# EAGLE board usb_current_mon (EAGLE 6.4)
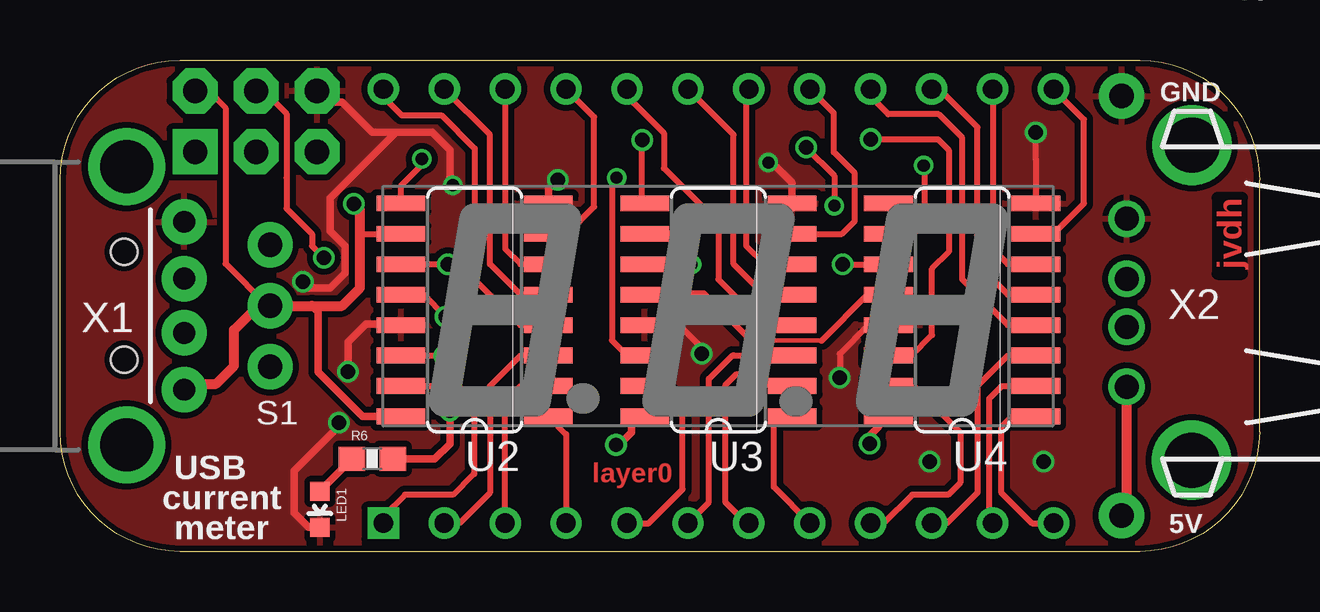
[diagram p0: board, top side]
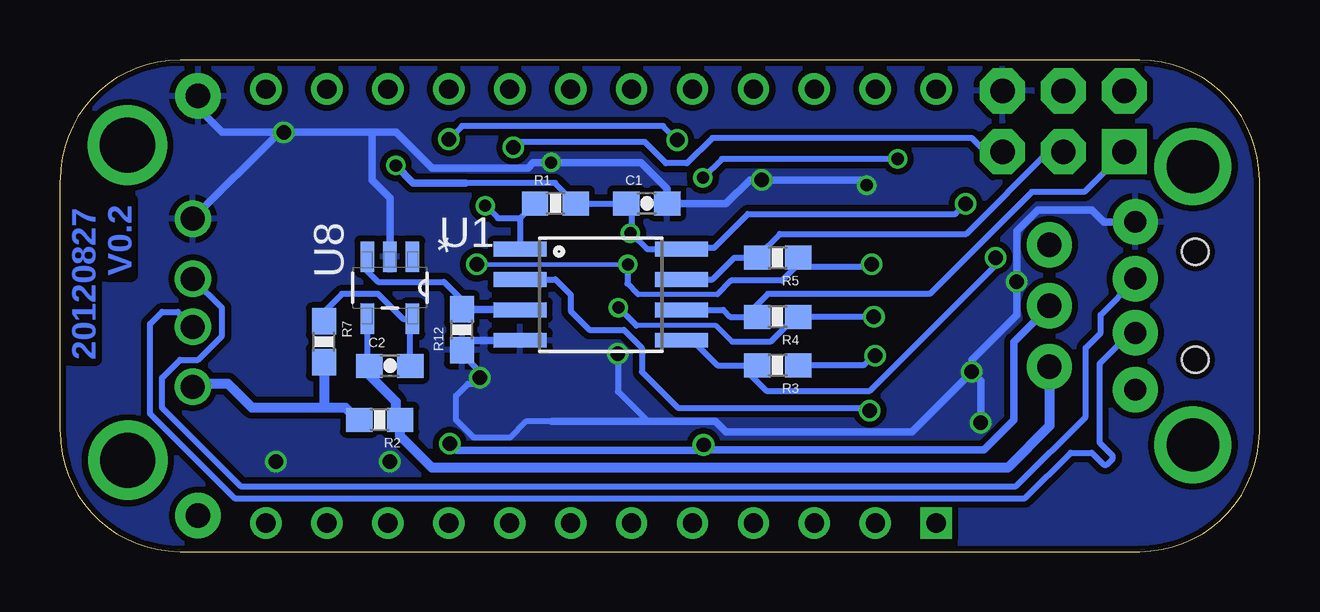
[diagram p1: board, bottom side, seen from below]

Size 50 x 20.5 mm. Coordinates in mm from the lower left corner, seen from the top.
Outline: 0,5 0,15.5 arc-90 5,20.5 45,20.5 arc-90 50,15.5 50,5 arc-90 45,0 5,0 arc-90 0,5
Copper layers (1*16): Top 0.035mm / dielectric 1.5mm / Bottom 0.035mm
Design rules "default": minimum track width 6mil, minimum drill 12mil, track to track 6mil, track to pad 6mil, pad to pad 6mil, via to via 6mil, smd to smd 0mil, copper to edge 10mil, drill to drill 10mil, minimum pad ring 10mil, minimum via ring 6mil, stop-mask expansion 2mil, vias tented up to drill 100mil, thermal gap 10mil

## Footprints (pad centres in the part's own frame; a part is rotated, then mirrored left to right if it is on the bottom)
0603-CAP = smd 1.1 x 1: 1 -0.85,0; 2 0.85,0
2X3-NS = drill 1.016 pad 1.88 square: 1 -2.54,-1.27 | drill 1.016 pad 1.88 octagon: 2 -2.54,1.27; 3 0,-1.27; 4 0,1.27; 5 2.54,-1.27; 6 2.54,1.27
1X01 = drill 1.016 pad 1.88: 1 0,0
LED-0603 = smd 0.8 x 0.8: A 0,-0.75; C 0,0.75
0603-RES = smd 1.1 x 1: 1 -0.85,0; 2 0.85,0
SWITCH-SPDT = drill 1.016 pad 1.88: 1 0,2.54; 2 0,0; 3 0,-2.54
SO08-EIAJ = smd 0.61 x 2.21: 1 -1.905,-3.378; 2 -0.635,-3.378; 3 0.635,-3.378; 4 1.905,-3.378; 5 1.905,3.353; 6 0.635,3.353; 7 -0.635,3.353; 8 -1.905,3.353
SO16 = smd 0.66 x 2.032: 1 -4.445,-3.073; 2 -3.175,-3.073; 3 -1.905,-3.073; 4 -0.635,-3.073; 5 0.635,-3.073; 6 1.905,-3.073; 7 3.175,-3.073; 8 4.445,-3.073; 9 4.445,3.073; 10 3.175,3.073; 11 1.905,3.073; 12 0.635,3.073; 13 -0.635,3.073; 14 -1.905,3.073; 15 -3.175,3.073; 16 -4.445,3.073
LCD-S301C31 = drill 0.8: A1 5.08,18.1; A2 15.24,18.1; A3 25.4,18.1; B1 7.62,18.1; B2 17.78,18.1; B3 27.94,18.1; C1 7.62,0; C2 17.78,0; C3 27.94,0; D1 5.08,0; D2 15.24,0; D3 25.4,0; DP1 10.16,0; DP2 20.32,0; E1 2.54,0; E2 12.7,0; E3 22.86,0; F1 2.54,18.1; F2 12.7,18.1; F3 22.86,18.1; G1 0,18.1; G2 10.16,18.1; G3 20.32,18.1 | drill 0.8 square: COM 0,0
SOT95P280X130-5N = smd 1.27 x 0.559: 1 -1.295,0.94; 2 -1.295,0; 3 -1.295,-0.94; 4 1.295,-0.94; 5 1.295,0.94
USB-A-H = drill 0.914 pad 1.88: D+ 2.4,1.127; D- 2.4,-1.127; GND 2.4,3.5; VBUS 2.4,-3.5 | drill 2.2: GND2 0,-5.8; GND3 0,5.8 | hole 1.1: -0.1,2.25; -0.1,-2.25
CON-AMP_USB = drill 1: 1 -3.5,12.99; 2 -1,12.99; 3 1,12.99; 4 3.5,12.99 | drill 2.3: P$1 6.575,10.264; P$2 -6.568,10.278

## Placement (x,y rotation side)
C1  100n  [0603-CAP]  25.54,14.52 0 bottom
C2  22p  [0603-CAP]  36.25,7.75 0 bottom
JP1  AVR_SPI_PRG_6NS  [2X3-NS]  8.18,17.94 0 top
JP3  M01PTH  [1X01]  44.25,1.5 0 top
JP4  M01PTH  [1X01]  44.25,19 0 top
LED1  [LED-0603]  10.84,1.75 180 top
R1  4k7  [0603-RES]  29.35,14.52 0 bottom
R2  0.024  [0603-RES]  36.67,5.5 180 bottom
R3  0  [0603-RES]  20.09,7.77 180 bottom
R4  0  [0603-RES]  20.09,9.79 180 bottom
R5  0  [0603-RES]  20.09,12.26 180 bottom
R6  620  [0603-RES]  13.02,3.87 0 top
R7  4.7k  [0603-RES]  39,8.75 270 bottom
R12  2.2k  [0603-RES]  33.25,9.25 90 bottom
S1  [SWITCH-SPDT]  8.76,10.25 0 top
U1  ATTINY45  [SO08-EIAJ]  27.45,10.71 270 bottom
U2  74HCT595D  [SO16]  17.29,10.07 90 top
U3  74HCT595D  [SO16]  27.45,10.07 90 top
U4  74HCT595D  [SO16]  37.6,10.07 90 top
U5  LCD-S301C31  [LCD-S301C31]  13.47,1.19 0 top
U8  ZXCT1010W5-7  [SOT95P280X130-5N]  36.25,11 270 bottom
U$2  [PF_LOGO_MEDIUM]  17.75,5.5 0 bottom
X1  USB-A-H  [USB-A-H]  2.77,10.25 0 top
X2  [CON-AMP_USB]  57.45,10.38 90 top

## Library data of the parts
C1 = SparkFun; FARNELL: 1759123; MF: AVX; MPN: 06033G104ZAT2A; OC_FARNELL: 317287
C2 = SparkFun; MF: AVX; MPN: 06033G104ZAT2A; OC_FARNELL: 317287
JP1 = SparkFun; MF: TE CONNECTIVITY / AMP; MPN: 826925-3; OC_FARNELL: 1248132
JP3 JP4 R2 R12 = SparkFun
LED1 = SparkFun; MF: AVAGO TECHNOLOGIES; MPN: ASMT-RR45-AQ902; OC_FARNELL: 1652080
R1 R7 = SparkFun; FARNELL: 2059627; MF: MULTICOMP; MPN: MCHP03W8F1002T5E; OC_FARNELL: 1576297
R3-R5 = SparkFun; FARNELL: 2008355; MF: BOURNS; MPN: CR0603-JW-102GLF; OC_FARNELL: 2008355
R6 = SparkFun; MF: MULTICOMP; MPN: MC 0.063W 0603 1% 620R; OC_FARNELL: 9331395
S1 = SparkFun; FARNELL: 674345; MF: EAO; MPN: 09-03290.01; OC_FARNELL: 674345
U1 = SparkFun; FARNELL: 1972162; MF: ATMEL; MPN: ATTINY45V-10SH; OC_FARNELL: 1972162
U2-U4 = 74xx-eu; FARNELL: 1288450; MF: TEXAS INSTRUMENTS; MPN: SN74AHC595D; OC_FARNELL: 1750222
U5 = usb_power; FARNELL: 1838930; MF: LUMEX; MPN: LCD-S301C31TR; OC_FARNELL: 1838930
U8 = usb_power; PACKAGE: SOT-25-5; SUPPLIER: DIODES INC.
U$2 = positive_feedback
X1 = SparkFun; FARNELL: 1696544; MF: MULTICOMP; MPN: MC32603; OC_FARNELL: 1696544
X2 = usb_current_mon; MF: MULTICOMP; MPN: MC32593; OC_FARNELL: 1696534

## Nets
!RST!: JP1.5 R1.1 U1.1
D+: X1.D+ X2.3
D-: X1.D- X2.2
DIG1_0: U2.6 U5.A1
DIG1_1: U2.7 U5.B1
DIG1_2: U2.1 U5.C1
DIG1_3: U2.2 U5.D1
DIG1_4: U2.3 U5.E1
DIG1_5: U2.5 U5.F1
DIG1_6: U2.4 U5.G1
DIG1_7: U2.15 U5.COM
DIG2_0: U3.6 U5.A2
DIG2_1: U3.7 U5.B2
DIG2_2: U3.1 U5.C2
DIG2_3: U3.2 U5.D2
DIG2_4: U3.3 U5.E2
DIG2_5: U3.5 U5.F2
DIG2_6: U3.4 U5.G2
DIG2_7: U3.15 U5.DP1
DIG3_0: U4.6 U5.A3
DIG3_1: U4.7 U5.B3
DIG3_2: U4.1 U5.C3
DIG3_3: U4.2 U5.D3
DIG3_4: U4.3 U5.E3
DIG3_5: U4.5 U5.F3
DIG3_6: U4.4 U5.G3
DIG3_7: U4.15 U5.DP2
GND: C1.2 JP1.6 JP4.1 LED1.C R12.1 U1.4 U2.8 U2.13 U3.8 U3.13 U4.8 U4.13 U8.2 X1.GND X2.4
MISO: JP1.1 R4.2 U1.6
MOSI: JP1.4 R3.2 U1.5
N$1: C2.2 R7.1 U8.5
N$4: LED1.A R6.1
N$5: U2.9 U3.14
N$6: U3.9 U4.14
N$7: R6.2 U1.2
REG_CLK: R4.1 U2.12 U3.12 U4.12
SCK: JP1.3 R5.2 U1.7
SHIFT_CLK: R5.1 U2.11 U3.11 U4.11
SR_IN: R3.1 U2.14
V_SENSE: R12.2 U1.3 U8.3
VCC: C1.1 JP1.2 R1.2 S1.2 U1.8 U2.10 U2.16 U3.10 U3.16 U4.10 U4.16 X1.VBUS
VCC2: C2.1 R2.1 S1.3 U8.4
VCC_OUT: JP3.1 R2.2 R7.2 X2.1

## Tracks (layer width: path | path; a pad name or v marks a point on that pad's centre or on a via)
!RST!  (via drill 0.51, 0.6)
  Top 0.254: v31.1,16.85 32.27,15.68 v32.27,14.43
  Bottom 0.254: R1.1 30.82,13.9 | 30.82,13.9 U1.1 | v32.27,14.43 31.75,13.9 30.82,13.9 | JP1.5 11.42,16.67 12,17.25 22.81,17.25 23.87,16.19 24.74,16.19 25.62,17.07 30.85,17.07 31.07,16.85 v31.1,16.85
D+
  Bottom 0.254: X2.3 43.25,10.16 43.25,9 44.25,8 45,8 45.75,7.25 45.75,6 42.48,2.73 10.15,2.73 7.25,5.62 7.25,8.5 6.62,9.12 6.62,9.88 5.17,11.32 X1.D+
D-
  Bottom 0.254: X2.2 45.09,10 45.75,10 46.25,9.5 46.25,5.75 42.73,2.23 9.78,2.23 7.88,4.12 7,4.12 6.5,3.62 6.38,3.62 6.12,3.88 6.12,4 6.67,4.55 6.67,7.82 5.38,9.12 X1.D-
DIG1_0
  Top 0.254: U5.A1 18.55,12.62 19.19,11.98 U2.6 20.46,11.98
DIG1_1
  Top 0.254: U2.7 21.13,13.25 22.27,14.38 22.27,18.11 U5.B1
DIG1_2
  Top 0.254: U2.1 21.09,4.89 U5.C1
DIG1_3
  Top 0.254: U5.D1 18.55,6.26 19.19,6.9 U2.2 20.46,6.9
DIG1_4
  Top 0.254: U2.3 19.19,8.17 17.92,6.9 17.92,2.46 16.65,1.19 U5.E1
DIG1_5
  Top 0.254: U2.5 19.19,10.71 17.92,11.98 17.92,17.38 U5.F1
DIG1_6
  Top 0.254: U5.G1 13.47,18.96 14.24,18.2 15.9,18.2 17.29,16.81 17.29,11.35 19.19,9.44 U2.4 20.46,9.44
DIG1_7
  Top 0.254: U2.15 16.63,6.9 17.27,6.26 17.27,3.23 17.23,3.23 16.38,2.38 14.38,2.38 13.47,1.48 U5.COM
DIG2_0
  Top 0.254: U5.A2 28.71,19.16 28.6,19.05 28.6,12.75 29.37,11.98 U3.6
DIG2_1
  Top 0.254: U3.7 32.59,13.25 33.12,13.79 33.12,15.77 32.25,16.65 32.25,18.29 U5.B2
DIG2_2
  Top 0.254: U5.C2 29.75,2.69 29.75,5.38 30,5.63 U3.1
DIG2_3
  Top 0.254: U5.D2 28.61,1.19 27.73,2.08 27.73,6.92 28.2,7.4 29.1,7.4 29.6,6.9 U3.2 30.62,6.9
DIG2_4
  Top 0.254: U5.E2 27.05,2.06 27.05,7.2 28.02,8.18 28.11,8.18 28.12,8.17 U3.3 30.62,8.17
DIG2_5
  Top 0.254: U3.5 29.35,10.71 28.08,11.98 28.08,17.38 U5.F2
DIG2_6
  Top 0.254: 30.62,9.44 U3.4 29.35,9.44 27.45,11.35 27.45,13.71 25.18,15.98 25.18,17.45 23.64,18.99 U5.G2
DIG2_7
  Top 0.254: U5.DP1 23.64,1.18 24.52,1.18 25.95,2.6 25.95,6.15 25.2,6.9 U3.15
DIG3_0
  Top 0.254: U5.A3 38.88,12.62 39.51,11.98 U4.6 40.78,11.98
DIG3_1
  Top 0.254: U4.7 41.41,13.25 42.69,14.52 42.69,18.02 U5.B3
DIG3_2
  Top 0.254: U4.1 39.68,5.63 39.23,5.17 39.23,2.48 40.52,1.19 U5.C3
DIG3_3
  Top 0.254: U5.D3 38.88,1.23 38.73,1.38 38.73,6.38 39.25,6.9 U4.2
DIG3_4
  Top 0.254: U4.3 39.51,8.17 38.24,6.9 38.24,2.46 36.97,1.19 U5.E3
DIG3_5
  Top 0.254: U4.5 39.51,10.71 38.24,11.98 38.24,17.7 36.65,19.29 U5.F3
DIG3_6
  Top 0.254: U4.4 39.51,9.44 37.6,11.35 37.6,17.26 36.63,18.23 34.53,18.23 33.8,18.96 U5.G3
DIG3_7
  Top 0.254: U4.15 34.56,6.88 35.62,6.88 37.52,4.97 37.52,2.88 37.02,2.38 35.52,2.38 34.33,1.18 33.8,1.18 U5.DP2
GND  (via drill 0.51, 0.6)
  Top 0.254: U4.8 40.68,16.35 40.67,16.35 v40.67,17.48 | U4.13 33.69,9.44 32.5,8.25 v32.5,7.25 | U3.13 25.81,9.44 26.75,8.5 v26.75,8.25
  Top 0.305: U3.8 30.52,15.38 29.68,16.23 v29.52,16.23 | U4.13 34.47,9.5 | U2.13 14.15,9.5 12.75,9.5 12,8.75 v12,7.5 | 14,17.5 11.25,14.75 11.25,13.38 11.88,12.75 11.88,11.62 11.25,11 10.38,11 v10.12,11.25 | JP1.6 11.18,18.75 11.75,18.75 13,17.5 14,17.5 | 14,17.5 15.5,17.5 16.25,16.75 16.25,15.4 v16.38,15.28 | U2.8 20.36,15.11 v20.75,15.5 | LED1.C 10.37,1 9.75,1.62 9.75,3.38 11.62,5.25 v11.62,5.38
  Bottom 0.254: 33.49,8.4 R12.1 | 33.5,8.15 R12.1 | 29.5,5.42 30.57,5.42 31.25,4.75 32.75,4.75 33.5,5.5 33.5,6.5 33,7 32.75,7 v32.5,7.25 32.5,7.5 33.25,8.25 R12.1 | 40.65,17.5 v40.67,17.48 | v26.75,8.25 26.75,6.67 25.5,5.42
  Bottom 0.305: 29.5,5.42 25.5,5.42 22.68,5.42 22.25,5 14.5,5 v12,7.5 | R12.1 32.84,8.8 U1.4 | 37,17.5 36,17.5 34.5,16 30.5,16 30.27,16.23 v29.52,16.23 25.77,16.23 24.69,15.14 C1.2 22.23,14.52 21.25,15.5 v20.75,15.5 16.6,15.5 v16.38,15.28 | 37,17.5 40.65,17.5 | v40.67,17.48 40.86,17.48 | 40.86,17.48 X2.4 | U8.2 36.25,14.75 37,15.5 37,17.5 | X1.GND 6.5,13.75 7,14.25 9.25,14.25 10.12,13.38 v10.12,11.25 10.12,9.88 12,8 v12,7.5 | v12,7.5 11.62,7.12 v11.62,5.38 | 40.86,17.48 40.88,17.5 43.25,17.5 44.25,18.5 JP4.1
  other vias: 36.25,3.75 41,3.75
  pour Top (isolate 0.254): -0.88,20.75 -0.88,-0.62 51.5,-0.62 51.5,20.75
  pour Bottom (isolate 0.254): -0.25,-0.5 -0.25,20.62 55.62,20.62 55.62,-0.5
MISO
  Bottom 0.254: U1.6 22.35,10.07 22.07,9.79 R4.2 21.19,9.79 21.25,9.85 21.25,10 20.5,10.75 13.75,10.75 9.5,15 7.3,15 JP1.1
MOSI  (via drill 0.6)
  Top 0.25: 9.45,18.26 9.45,15.57
  Top 0.254: 9.45,15.57 9.45,14.3 10.5,13.25 10.5,12.75 v11,12.25 | 9.45,18.26 8.49,19.21 JP1.4
  Bottom 0.254: U1.5 23.64,8.8 22.6,7.77 R3.2 20.99,7.77 21.27,7.5 | 21.09,7.96 21.09,7.33 21.25,7.5 | v11,12.25 11,11.95 16.25,6.7 20.56,6.7 21.31,7.45 21.27,7.5 | 21.25,7.5 21.31,7.55 | 21.27,7.5 21.25,7.5
N$1
  Bottom 0.254: C2.2 35.4,9.62 U8.5 | R7.1 39,10 38.25,10.75 36.75,10.75 35.7,9.71 U8.5 | 35.45,9.71 U8.5
N$4
  Top 0.305: R6.1 10.84,2.54 LED1.A
N$5  (via drill 0.51)
  Top 0.254: U2.9 14.21,15.26 15.08,16.12 v15.08,16.38 | U3.14 23.64,8.17 23,8.8 23,15.46 23.14,15.59 v23.2,15.59
  Bottom 0.254: v15.08,16.38 22.41,16.38 v23.2,15.59
N$6  (via drill 0.6)
  Top 0.254: U3.9 24.27,14.62 v24.27,17.16 | v33.8,17.2 36.6,17.2 37.05,16.75 37.05,12.5 36.34,11.8 36.34,9.03 35.46,8.14 34.56,8.14 U4.14
  Bottom 0.254: v24.27,17.16 24.86,17.75 33.25,17.75 v33.8,17.2
N$7  (via drill 0.6)
  Top 0.305: v16.25,5.88 16.25,4.5 15.62,3.87 R6.2
  Bottom 0.254: U1.2 29.35,11.35 28.71,10.71 28.71,10.04 27.93,9.25 26.5,9.25 25.75,8.5 25.75,7.5 24.25,6 16.38,6
  Bottom 0.305: 16.38,6 v16.25,5.88
REG_CLK  (via drill 0.51, 0.6)
  Top 0.178: 28.82,8.8 31.73,8.8
  Top 0.254: U3.12 24.44,10.78 26.82,10.78 27.43,10.18 | U4.12 33.66,10.71 31.75,8.8 31.73,8.8 | v26.73,10.18 27.43,10.18 | v16.07,9.79 15.15,10.71 U2.12 | 27.43,10.18 28.8,8.8 28.82,8.8
  Bottom 0.203: 21.98,8.75 22.65,9.43 25.98,9.43
  Bottom 0.254: v16.07,9.79 R4.1 19.25,9.78 19.62,9.78 19.62,9.52 20.39,8.75 21.98,8.75 | 25.98,9.43 v26.73,10.18
SCK
  Bottom 0.254: U1.7 22.8,11.35 21.89,12.26 R5.2 20.93,12.31 20,13.25 12.22,13.25 8.8,16.67 JP1.3
SHIFT_CLK  (via drill 0.51, 0.6)
  Top 0.254: U3.11 v26.32,11.97 | U2.11 v16.16,11.98 | v32.62,11.97 U4.11
  Bottom 0.178: 26.43,11.97 v32.62,11.97
  Bottom 0.203: 22.6,10.72 25.9,10.72
  Bottom 0.254: v26.32,11.97 26.43,11.97 26.35,11.9 26.35,11.18 25.9,10.72 | 22.6,10.72 22.02,11.3 19.9,11.3 19.23,11.96 R5.1 19.32,12.16 19.32,11.88 16.27,11.88 v16.16,11.98
SR_IN  (via drill 0.6)
  Top 0.254: U2.14 v16.02,8.17
  Bottom 0.254: R3.1 16.5,7.77 16.1,8.17 v16.02,8.17
V_SENSE
  Bottom 0.254: U8.3 37.19,11.69 36.75,11.25 34,11.25 33.25,10.5 R12.2
  Bottom 0.305: U1.3 30.85,10.1 R12.2
VCC  (via drill 0.51, 0.6)
  Top 0.25: 6.91,18.5 6.91,12.01
  Top 0.254: U4.10 35.58,13.25 36.05,13.72 36.05,16.05 v36,16.1 | v26.23,13.28 24.4,13.28 U3.10 | U3.16 24.32,5.58 | 12.5,13.25 U2.10 | S1.2 8.66,10.25 6.91,12.01 | 6.91,18.5 6.2,19.21 JP1.2
  Top 0.305: 24.32,5.58 23.82,5.58 23.82,4.97 23.3,4.45 v23.18,4.45 | U2.16 12.62,5.63 10.75,7.5 10.75,10 10.5,10.25 | v33.75,4.5 33.75,4.85 U4.16
  Top 0.406: X1.VBUS 5.42,7 6.5,7 7.25,7.75 7.25,9.25 8.25,10.25 S1.2 10.5,10.25 11.75,10.25 12.5,11 12.5,13.25 12.5,14.25 v12.25,14.5
  Bottom 0.254: 26.18,13.43 26.18,14.3 C1.1 R1.2 29.36,15.38 33.1,15.38 | 26.18,13.25 25.54,12.62 U1.8 24.03,12.68 22.73,12.68 21.32,14.07 12.68,14.07 v12.25,14.5 | 23.12,4.25 23.18,4.3 v23.18,4.45 23.2,4.45
  Bottom 0.305: 23.12,4.25 11.5,4.25 10.25,5.5 10.25,8.75 S1.2 | 33.1,15.38 35.27,15.38 v36,16.1 | v33.75,4.5 33.48,4.22 23.43,4.22 23.2,4.45 | 26.18,13.43 26.23,13.38 v26.23,13.28 26.2,13.28 26.18,13.25
VCC2
  Bottom 0.254: U8.4 37.19,7.59 | 36,5.92 35.83,5.75 R2.1
  Bottom 0.406: S1.3 8.76,5.24 10.5,3.5 34.5,3.5 35.83,4.83 R2.1 | 37.19,7.59 37.19,7.66 C2.1 37.1,7.35 36,6.25 36,5.92
VCC_OUT
  Top 0.406: JP3.1 44.46,1.71 X2.1
  Bottom 0.406: 39,6 38.1,6 37.6,5.5 R2.2 | 39,6 42,6 43,7 44.34,7 X2.1 | R7.2 39,6

## Text on the board
Top: jvdh | layer0
Bottom: V0.2 | 20120827
_tsilk: O/N: 57901 | GND | USB | current | meter | 5V
_bsilk: http://usbpwr.blogspot.com